# Altium PCB Copy of USBC PCB.PcbDoc
Units mil, origin at the board's own origin, x right, y up, seen from the top; angles counter-clockwise.
Board outline 6000 x 4000 mil, 2 copper layers (Top Layer, Bottom Layer); 3 components, 5 nets, 37 pads, 0 vias.
Unrouted connection lines stored in the file: 10.
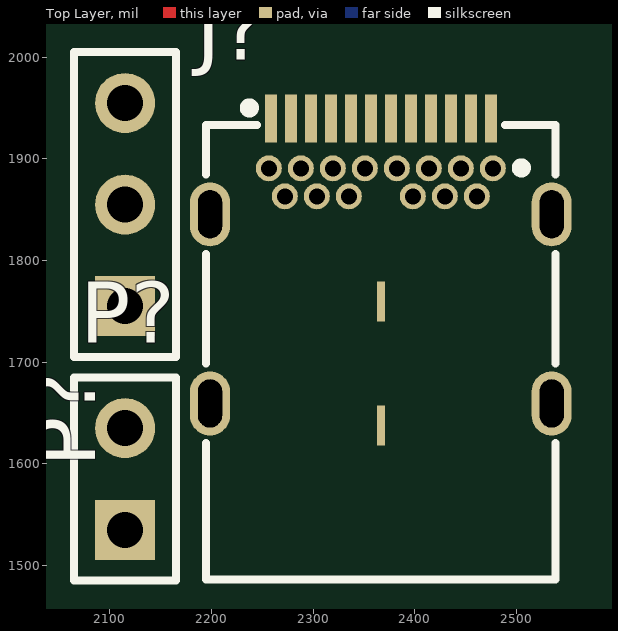
[diagram p0: Top Layer view]
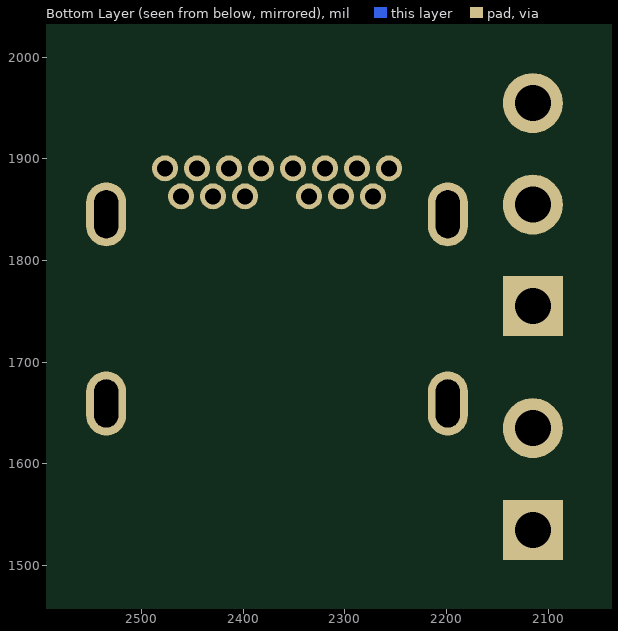
[diagram p1: Bottom Layer view, seen from below]

## Layer stack, top to bottom
Top Solder: solder mask 0.4, Solder Resist, Dk 3.5
Top Layer: signal copper 1.4
Dielectric 1: dielectric 12.6, FR-4, Dk 4.8
Bottom Layer: signal copper 1.4
Bottom Solder: solder mask 0.4, Solder Resist, Dk 3.5

## Board outline
1000,1000 7000,1000 7000,5000 1000,5000
cut-out: 1935,1625

## Design rules (kind name [scope] priority, off if disabled: settings)
Clearance [All] p1: gap=10 ignorepadtopadclearanceinfootprint=FALSE except(0: Arc-SMDPad Arc-THPad Arc-Hole Track-SMDPad Track-THPad Track-Hole SMDPad-Hole THPad-Hole Via-Hole Fill-Hole Poly-Hole Region-Hole Text-Hole)
PolygonConnect [All] p1: connectstyle=Relief reliefconductorwidth=10 reliefentries=4 polygonreliefangle="90 Angle" airgapwidth=10
RoomDefinition UsbC [InComponentClass('UsbC')] p1: confinementstyle=ConfineIn formatcopy=TRUE lockcomponents=FALSE outline 2040,1470 2570,1470 2570,2030 2040,2030
RoutingVias [All] p1: holewidth=28 width=50 viastyle="Through Hole" minholewidth=28 minwidth=50 maxholewidth=28 maxwidth=50
SolderMaskExpansion [All] p1: expansion=4
Width [All] p1: maxlimit=10 minlimit=10 preferedwidth=10
30 further rules are at their usual default settings.

## Classes and differential pairs
component class UsbC: J? P?

## Components (designator, comment, footprint, x,y, rotation, side; value= is the part's Value field where it differs from the comment)
J? "632723300011" 632723300011 2366.74,1718.15 r0 top
P? "Header 3" HDR1X3 2115,1755 r90 top
P? "Header 2" HDR1X2 2115,1535 r90 top

## Footprints (in the part's own frame and the unit in brackets; to place one, negate y for a bottom-side part, rotate by r counter-clockwise, add the part's x,y. Pads: shape width x height; smd on the part's side, far side on the other; paste and mask are expansions set on the pad)
632723300011 [mm] "USB 3.1 Type C Receptacle Horizontal THR"
  rect 0.3x1.2 smd: A1(-2.75,5.635) A2(-2.25,5.635) A3(-1.75,5.635) A4(-1.25,5.635) A5(-0.75,5.635) A6(-0.25,5.635) A7(0.25,5.635) A8(0.75,5.635) A9(1.25,5.635) A10(1.75,5.635) A11(2.25,5.635) A12(2.75,5.635)
  round 0.65 hole 0.4: B1(2.8,4.385) B2(2.4,3.685) B3(1.6,3.685) B4(1.2,4.385) B5(0.8,3.685) B6(0.4,4.385) B7(-0.4,4.385) B8(-0.8,3.685) B9(-1.2,4.385) B10(-1.6,3.685) B11(-2.4,3.685) B12(-2.8,4.385) Shell(-2,4.385) Shell(2,4.385)
  oval 1x1.6 hole 0.6 slot 1.2 at 90 deg: Shell(-4.27,-1.495) Shell(-4.27,3.235) Shell(4.27,-1.495) Shell(4.27,3.235)
  rect 0.2x1 smd: ""(0,-2.045) ""(0,1.055)
  silkscreen extent -4.37,-5.89 4.37,6.01, body extent -4.37,-5.9 4.37,5.9, height 3.05
HDR1X2 [mm] "Connector; Header; 2 Position"
  rect 1.5x1.5 hole 0.9: 1(0,0)
  round 1.5 hole 0.9: 2(2.54,0)
  silkscreen extent -1.27,-1.27 3.81,1.27
HDR1X3 [mm] "Connector; Header; 3 Position"
  rect 1.5x1.5 hole 0.9: 1(0,0)
  round 1.5 hole 0.9: 2(2.54,0) 3(5.08,0)
  silkscreen extent -1.27,-1.27 6.35,1.27

## Part data
J?: "USB 3.1 Type C Receptacle Horizontal THR WR-COM", ComponentLink1Description=Manufacturer, ComponentLink1URL=http://www.we-online.de, ComponentLink2Description=Datasheet, ComponentLink2URL=http://katalog.we-online.de/em/datasheet/632723x00011.pdf, Construction=THR, Gender=Receptacle, Interface Type="Type C", Part Number=632723300011, Published Date="April 2017", Publisher="Wurth Elektronik", Sub-Family="USB 3.1", Type=Horizontal
P?: "Header, 3-Pin", LatestRevisionDate=17-Jul-2002, LatestRevisionNote="Re-released for DXP Platform.", Publisher="Altium Limited"
P?: "Header, 2-Pin", LatestRevisionDate=17-Jul-2002, LatestRevisionNote="Re-released for DXP Platform.", Publisher="Altium Limited"

## Nets (pads, with @x,y where several pads share a name; then routed paths per layer and width w, separated by ;. In a path a pad name is that pad's centre, name@x,y a point inside that pad or via, vN(x,y) a via of type N, cw(c..) or ccw(c..) an arc to the next point about the centre after c; other vN are vias at no path point)
+5: J?.A8 J?.A9 P?.2@2115,1855
+12: J?.A4 J?.A5 P?.1@2115,1755
CAN_H: J?.B7 P?.1@2115,1535
CAN_L: J?.B6 P?.2@2115,1635
GND: J?.A1 J?.A12 J?.B1 J?.B12 P?.3
pads on no net: J?. J?.A2 J?.A3 J?.A6 J?.A7 J?.A10 J?.A11 J?.B2 J?.B3 J?.B4 J?.B5 J?.B8 J?.B9 J?.B10 J?.B11 J?.Shell
copper on no net: | length 6.4
  Top Layer w10: 2475,1892.76 2476.97,1890.79 2476.97,1887.17